# EAGLE board Tarea4HD_DiegoUrbanoTinkercad (EAGLE 9.7.0)

Size 260.02 x 37.54 mm. Coordinates in mm from the lower left corner, seen from the top.
Outline: 0,0 260.02,0 260.02,37.55 0,37.55 0,0
Copper layers (1*16): Top 0.035mm / dielectric 1.5mm / Bottom 0.035mm
Design rules "default": minimum track width 6mil, minimum drill 0.35mm, track to track 6mil, track to pad 6mil, pad to pad 6mil, via to via 6mil, smd to smd 6mil, copper to edge 40mil, drill to drill 6mil, minimum pad ring 10mil, minimum via ring 8mil, stop-mask expansion 4mil, vias tented up to drill 0mil, thermal gap 10mil

## Footprints (pad centres in the part's own frame; a part is rotated, then mirrored left to right if it is on the bottom)
LEDRD254W60D565H860B_G = drill 0.981 pad 1.581: 1 -1.27,0; 2 1.27,0
LEDRD254W60D565H860B = drill 0.981 pad 1.581: 1 -1.27,0; 2 1.27,0
LEDRD254W60D565H860B_B = drill 0.981 pad 1.581: 1 -1.27,0; 2 1.27,0
RESAD1016W63L850D250B = drill 0.83 pad 1.43: 1 -5.08,0; 2 5.08,0
78B04ST = drill 0.8: 1 -3.81,-3.81; 2 -1.27,-3.81; 3 1.27,-3.81; 4 3.81,-3.81; 5 3.81,3.81; 6 1.27,3.81; 7 -1.27,3.81; 8 -3.81,3.81
DIP762W53P254L1969H508Q14B = drill 0.743 pad 1.343: 1 -3.81,7.62; 2 -3.81,5.08; 3 -3.81,2.54; 4 -3.81,0; 5 -3.81,-2.54; 6 -3.81,-5.08; 7 -3.81,-7.62; 8 3.81,-7.62; 9 3.81,-5.08; 10 3.81,-2.54; 11 3.81,0; 12 3.81,2.54; 13 3.81,5.08; 14 3.81,7.62

## Placement (x,y rotation side)
D1  GREEN  [LEDRD254W60D565H860B_G]  224.48,18.28 180 top
D2  RED  [LEDRD254W60D565H860B]  252.42,18.28 180 top
DIGUAL  BLUE  [LEDRD254W60D565H860B_B]  99.04,18.41 180 top
R1  10k  [RESAD1016W63L850D250B]  6.33,28.57 90 top
R2  10k  [RESAD1016W63L850D250B]  8.87,28.57 90 top
R3  10k  [RESAD1016W63L850D250B]  11.41,28.57 90 top
R4  10k  [RESAD1016W63L850D250B]  13.95,28.57 90 top
R5  10k  [RESAD1016W63L850D250B]  21.57,28.57 90 top
R6  10k  [RESAD1016W63L850D250B]  24.11,28.57 90 top
R7  10k  [RESAD1016W63L850D250B]  26.65,28.57 90 top
R8  10k  [RESAD1016W63L850D250B]  29.19,28.57 90 top
R9  220  [RESAD1016W63L850D250B]  225.75,10.66 90 top
R10  220  [RESAD1016W63L850D250B]  100.31,10.79 90 top
R11  220  [RESAD1016W63L850D250B]  253.69,10.66 90 top
SWA  SPST-478B04ST  [78B04ST]  10.14,9.53 0 top
SWB  SPST-478B04ST  [78B04ST]  25.38,9.53 0 top
U1  74HC04_PDIP  [DIP762W53P254L1969H508Q14B]  64.75,9.53 90 top
U2  74HC86_PDIP  [DIP762W53P254L1969H508Q14B]  44.43,9.53 90 top
U3  74HC08_PDIP  [DIP762W53P254L1969H508Q14B]  87.61,9.53 90 top
U4  74HC32_PDIP  [DIP762W53P254L1969H508Q14B]  213.05,9.39 90 top
U5  74HC02_PDIP  [DIP762W53P254L1969H508Q14B]  238.45,9.39 90 top
U6  74HC04_PDIP  [DIP762W53P254L1969H508Q14B]  115.55,9.53 90 top
U7  74HC08_PDIP  [DIP762W53P254L1969H508Q14B]  158.73,9.53 90 top
U8  74HC08_PDIP  [DIP762W53P254L1969H508Q14B]  192.73,9.39 90 top
UGENERA_G3,G2,G1,G0  74HC08_PDIP  [DIP762W53P254L1969H508Q14B]  135.87,9.53 90 top

## Library data of the parts
D1 = Tinkercad; CATEGORY: Opto-Electronic; SUB-CATEGORY: LED; VALUE: LED_GREEN
D2 = Tinkercad; CATEGORY: Opto-Electronic; SUB-CATEGORY: LED; VALUE: LED_RED
DIGUAL = Tinkercad; CATEGORY: Opto-Electronic; SUB-CATEGORY: LED; VALUE: LED_BLUE
R1-R11 SWA SWB U1-U8 UGENERA_G3,G2,G1,G0 = Tinkercad

## Nets
D2_A: D2.1 R11.2
U1_1Y: U1.2 U3.1 U7.1 U7.4
U1_2Y: U1.4 U3.2 U7.5
U1_3Y: U1.6 U3.5 U7.13
U1_4Y: U1.8 U3.10
U1_5V: SWA.1 SWA.2 SWA.3 SWA.4 SWB.1 SWB.2 SWB.3 SWB.4 U1.5V U1.14 U2.14 U3.14 U4.14 U5.14 U6.14 U7.14 U8.14 UGENERA_G3,G2,G1,G0.14
U1_GND: D1.2 D2.2 DIGUAL.2 R1.2 R2.2 R3.2 R4.2 R5.2 R6.2 R7.2 R8.2 U1.7 U1.GND@0 U1.GND@1 U1.GND@2 U2.7 U3.7 U4.7 U5.7 U6.7 U7.7 U8.7 UGENERA_G3,G2,G1,G0.7
U2_1A: R1.1 SWA.8 U2.1 UGENERA_G3,G2,G1,G0.1
U2_1B: R5.1 SWB.8 U2.2 U6.1
U2_1Y: U1.1 U2.3
U2_2A: R2.1 SWA.7 U2.4 UGENERA_G3,G2,G1,G0.4
U2_2B: R6.1 SWB.7 U2.5 U6.3
U2_2Y: U1.3 U2.6
U2_3A: R3.1 SWA.6 U2.9 UGENERA_G3,G2,G1,G0.9
U2_3B: R7.1 SWB.6 U2.10 U6.5
U2_3Y: U1.5 U2.8
U2_4A: R4.1 SWA.5 U2.12 UGENERA_G3,G2,G1,G0.12
U2_4B: R8.1 SWB.5 U2.13 U6.9
U2_4Y: U1.9 U2.11
U3_1Y: U3.3 U3.4
U3_2Y: U3.6 U3.9
U3_3Y: R10.1 U3.8
U4_1Y: U4.3 U4.4
U4_2Y: U4.6 U4.9
U4_3Y: R9.1 U4.8
U5_1A: DIGUAL.1 R10.2 U5.2
U5_1B: D1.1 R9.2 U5.3
U5_1Y: R11.1 U5.1
U6_1Y: U6.2 UGENERA_G3,G2,G1,G0.2
U6_2Y: U6.4 UGENERA_G3,G2,G1,G0.5
U6_3Y: U6.6 UGENERA_G3,G2,G1,G0.10
U6_4Y: U6.8 UGENERA_G3,G2,G1,G0.13
U7_1Y: U4.2 U7.3
U7_2Y: U7.6 U7.9 U7.12
U7_3Y: U4.5 U7.8
U7_4Y: U7.11 U8.13
U8_4Y: U4.10 U8.11
UGENERA_G3,G2,G1,G0_1Y: U4.1 UGENERA_G3,G2,G1,G0.3
UGENERA_G3,G2,G1,G0_2Y: U7.2 UGENERA_G3,G2,G1,G0.6
UGENERA_G3,G2,G1,G0_3Y: U7.10 UGENERA_G3,G2,G1,G0.8
UGENERA_G3,G2,G1,G0_4Y: U8.12 UGENERA_G3,G2,G1,G0.11

## Tracks (layer width: path | path; a pad name or v marks a point on that pad's centre or on a via)
D2_A  (1 unrouted)
U1_1Y  (3 unrouted)
U1_2Y  (2 unrouted)
U1_3Y  (2 unrouted)
U1_4Y  (1 unrouted)
U1_5V  (17 unrouted)
U1_GND  (22 unrouted)
U2_1A  (3 unrouted)
U2_1B  (3 unrouted)
U2_1Y  (1 unrouted)
U2_2A  (3 unrouted)
U2_2B  (3 unrouted)
U2_2Y  (1 unrouted)
U2_3A  (3 unrouted)
U2_3B  (3 unrouted)
U2_3Y  (1 unrouted)
U2_4A  (3 unrouted)
U2_4B  (3 unrouted)
U2_4Y  (1 unrouted)
U3_1Y  (1 unrouted)
U3_2Y  (1 unrouted)
U3_3Y  (1 unrouted)
U4_1Y  (1 unrouted)
U4_2Y  (1 unrouted)
U4_3Y  (1 unrouted)
U5_1A  (2 unrouted)
U5_1B  (2 unrouted)
U5_1Y  (1 unrouted)
U6_1Y  (1 unrouted)
U6_2Y  (1 unrouted)
U6_3Y  (1 unrouted)
U6_4Y  (1 unrouted)
U7_1Y  (1 unrouted)
U7_2Y  (2 unrouted)
U7_3Y  (1 unrouted)
U7_4Y  (1 unrouted)
U8_4Y  (1 unrouted)
UGENERA_G3,G2,G1,G0_1Y  (1 unrouted)
UGENERA_G3,G2,G1,G0_2Y  (1 unrouted)
UGENERA_G3,G2,G1,G0_3Y  (1 unrouted)
UGENERA_G3,G2,G1,G0_4Y  (1 unrouted)